# EAGLE board SparkFun_Noisy_Cricket-Panel_V10 (EAGLE 7.7.0), part 1 of 3
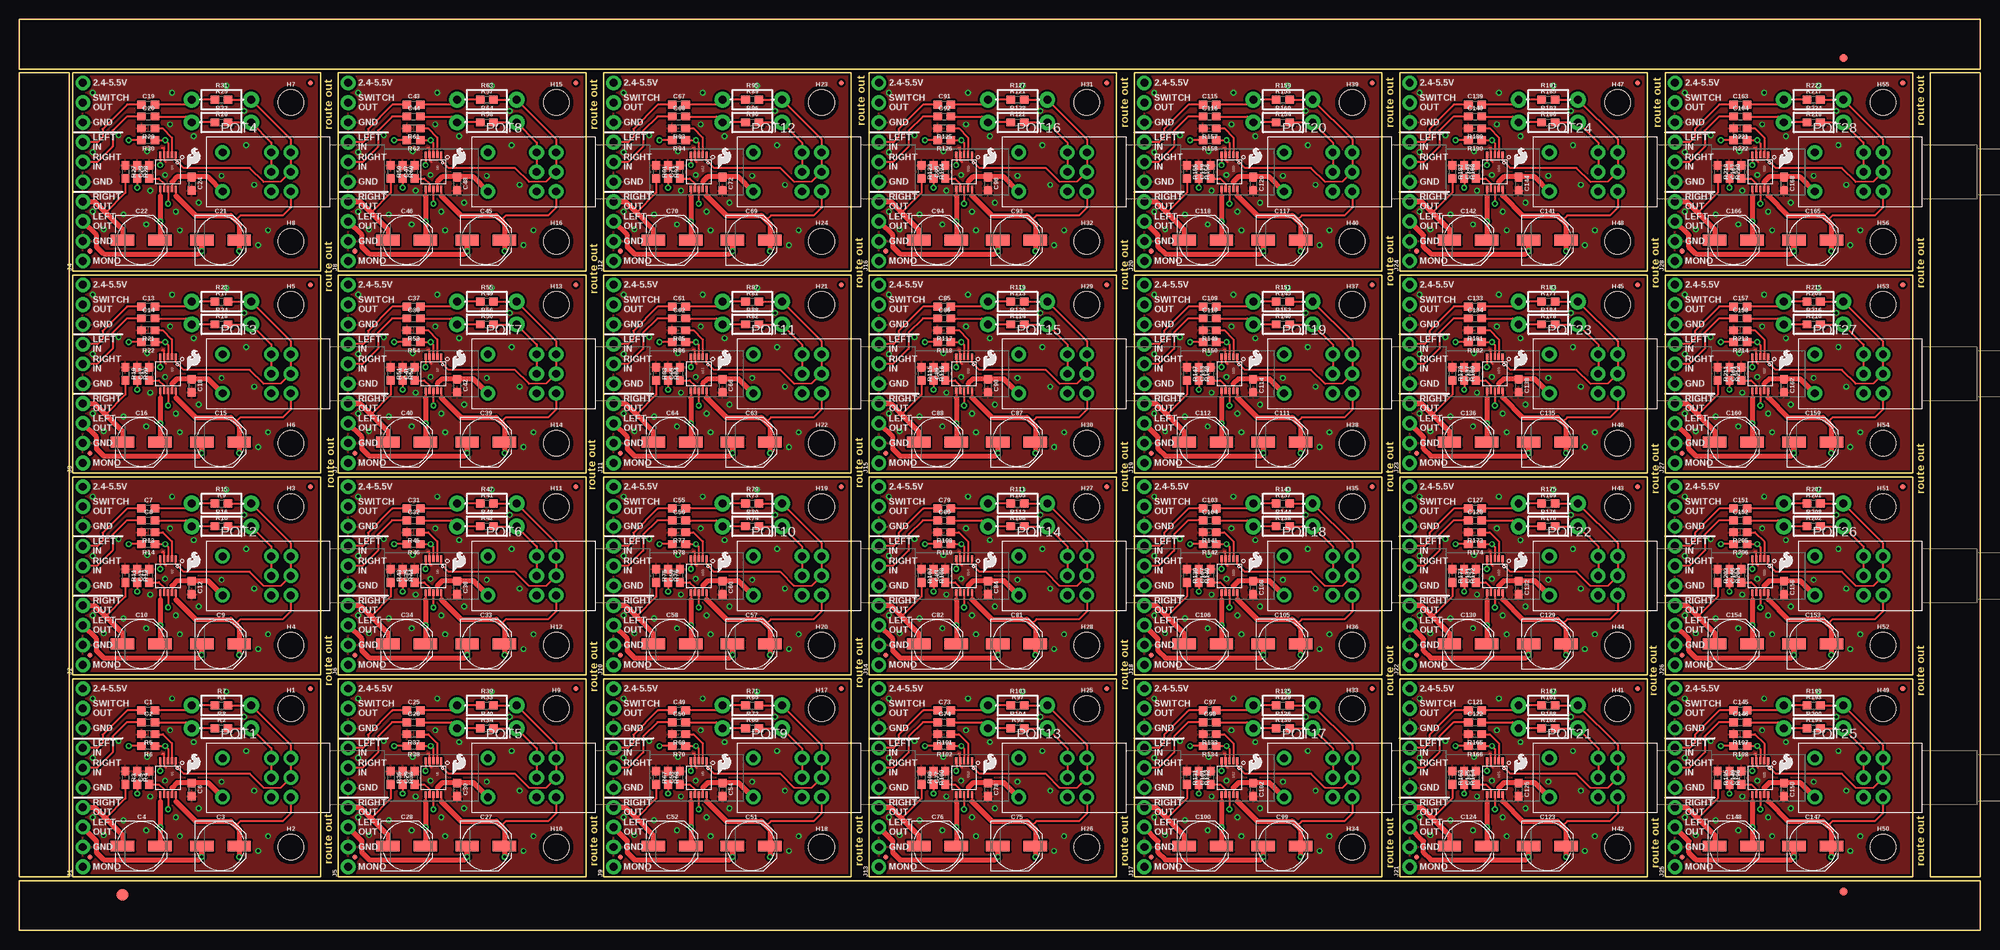
[diagram p0: board, top side]
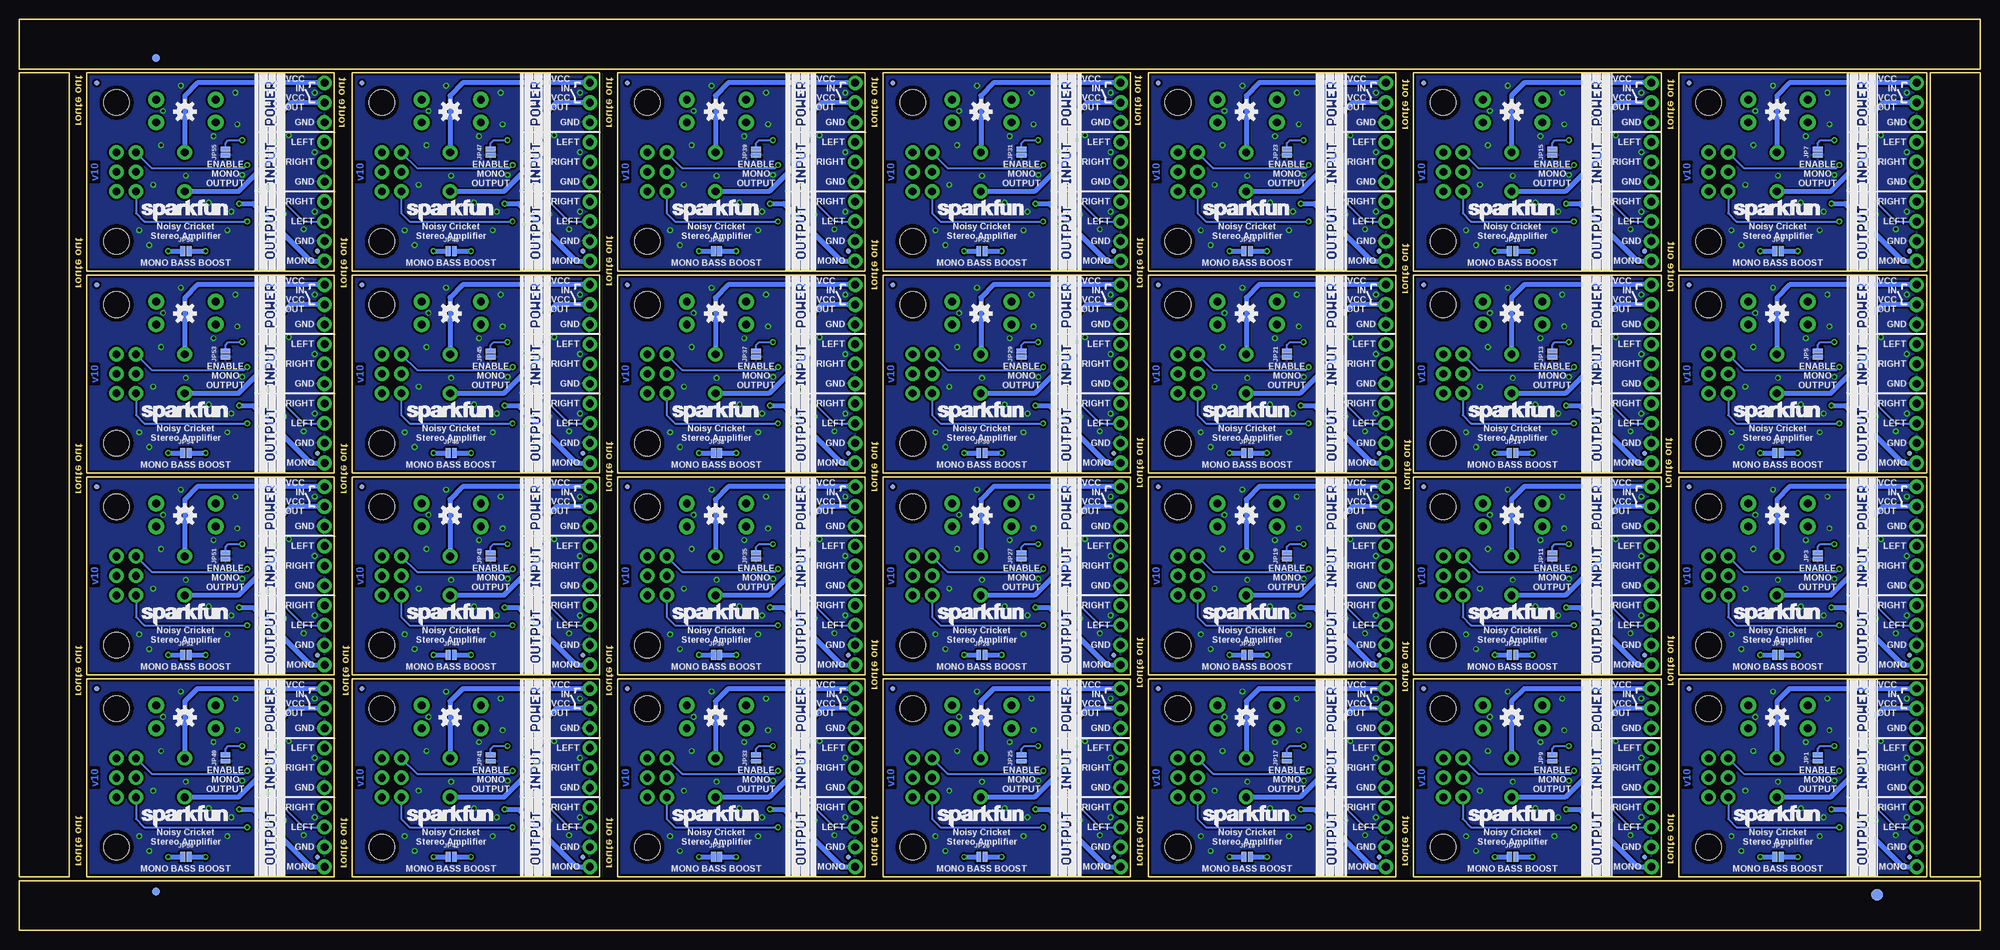
[diagram p1: board, bottom side, seen from below]

Size 251.46 x 116.84 mm. Coordinates in mm from the lower left corner, seen from the top.
Outline: 6.35,79.25 6.35,6.86 0,6.86 0,29.72
Outline: 0,27.18 0,109.98 6.35,109.98 6.35,76.71
Outline: 79.25,0 0,0 0,6.35 29.72,6.35
Outline: 27.18,6.35 251.46,6.35 251.46,0 76.71,0
Outline: 170.43,116.84 251.46,116.84 251.46,110.49 219.96,110.49
Outline: 222.5,110.49 0,110.49 0,116.84 172.97,116.84
Outline: 251.46,79.25 251.46,6.86 245.11,6.86 245.11,29.72
Outline: 245.11,27.18 245.11,109.98 251.46,109.98 251.46,76.71
Outline: 6.86,6.86 38.61,6.86 38.61,32.26 6.86,32.26 6.86,6.86
Outline: 6.86,32.77 38.61,32.77 38.61,58.17 6.86,58.17 6.86,32.77
Outline: 6.86,58.67 38.61,58.67 38.61,84.07 6.86,84.07 6.86,58.67
Outline: 6.86,84.58 38.61,84.58 38.61,109.98 6.86,109.98 6.86,84.58
Outline: 40.89,6.86 72.64,6.86 72.64,32.26 40.89,32.26 40.89,6.86
Outline: 40.89,32.77 72.64,32.77 72.64,58.17 40.89,58.17 40.89,32.77
Outline: 40.89,58.67 72.64,58.67 72.64,84.07 40.89,84.07 40.89,58.67
Outline: 40.89,84.58 72.64,84.58 72.64,109.98 40.89,109.98 40.89,84.58
Outline: 74.93,6.86 106.68,6.86 106.68,32.26 74.93,32.26 74.93,6.86
Outline: 74.93,32.77 106.68,32.77 106.68,58.17 74.93,58.17 74.93,32.77
Outline: 74.93,58.67 106.68,58.67 106.68,84.07 74.93,84.07 74.93,58.67
Outline: 74.93,84.58 106.68,84.58 106.68,109.98 74.93,109.98 74.93,84.58
Outline: 108.97,6.86 140.72,6.86 140.72,32.26 108.97,32.26 108.97,6.86
Outline: 108.97,32.77 140.72,32.77 140.72,58.17 108.97,58.17 108.97,32.77
Outline: 108.97,58.67 140.72,58.67 140.72,84.07 108.97,84.07 108.97,58.67
Outline: 108.97,84.58 140.72,84.58 140.72,109.98 108.97,109.98 108.97,84.58
Outline: 143,6.86 174.75,6.86 174.75,32.26 143,32.26 143,6.86
Outline: 143,32.77 174.75,32.77 174.75,58.17 143,58.17 143,32.77
Outline: 143,58.67 174.75,58.67 174.75,84.07 143,84.07 143,58.67
Outline: 143,84.58 174.75,84.58 174.75,109.98 143,109.98 143,84.58
Outline: 177.04,6.86 208.79,6.86 208.79,32.26 177.04,32.26 177.04,6.86
Outline: 177.04,32.77 208.79,32.77 208.79,58.17 177.04,58.17 177.04,32.77
Outline: 177.04,58.67 208.79,58.67 208.79,84.07 177.04,84.07 177.04,58.67
Outline: 177.04,84.58 208.79,84.58 208.79,109.98 177.04,109.98 177.04,84.58
Outline: 211.07,6.86 242.82,6.86 242.82,32.26 211.07,32.26 211.07,6.86
Outline: 211.07,32.77 242.82,32.77 242.82,58.17 211.07,58.17 211.07,32.77
Outline: 211.07,58.67 242.82,58.67 242.82,84.07 211.07,84.07 211.07,58.67
Outline: 211.07,84.58 242.82,84.58 242.82,109.98 211.07,109.98 211.07,84.58
Copper layers (1*16): Top 0.035mm / dielectric 1.5mm / Bottom 0.035mm
Design rules "SparkFun-2-layer-TIGHT": minimum track width 7mil, minimum drill 15mil, track to track 7mil, track to pad 7mil, pad to pad 7mil, via to via 7mil, smd to smd 7mil, copper to edge 7mil, drill to drill 7mil, minimum pad ring 7mil, minimum via ring 7mil, stop-mask expansion 4mil, vias tented up to drill 25mil, thermal gap 10mil

## Footprints (pad centres in the part's own frame; a part is rotated, then mirrored left to right if it is on the bottom)
0603 = smd 1.1 x 1: 1 -0.85,0; 2 0.85,0
PANASONIC_D = smd 3 x 1.4: + 2.4,0; - -2.4,0
FIDUCIAL-1.5X3 = smd 1.5 x 1.5: 1 0,0
FIDUCIAL-1X2 = smd 1 x 1: 1 0,0
FIDUCIAL-MICRO = smd 0.635 x 0.635: 1 0,0
STAND-OFF = hole 3.302: 0,0
1X10_NO_SILK = drill 1.016 pad 1.88: 1 0,0; 2 2.54,0; 3 5.08,0; 4 7.62,0; 5 10.16,0; 6 12.7,0; 7 15.24,0; 8 17.78,0; 9 20.32,0; 10 22.86,0
SMT-JUMPER_2_NO_NO-SILK = smd 0.635 x 1.27: 1 -0.406,0; 2 0.406,0
POT-DUAL-SWITCH-PTH = drill 1 pad 1.88: A1 2.54,2.5; A2 2.54,0; A3 2.54,-2.5; B1 0.04,2.5; B2 0.04,0; B3 0.04,-2.5; SW1 -6.21,2.5; SW2 -6.21,-2.5
AXIAL-0.3-KIT = drill 1.016 pad 2.032: P$1 -3.81,0; P$2 3.81,0
TFSOP-10 = smd 0.85 x 0.29: BP 2.175,-0.5; BTL 2.175,0; GND -2.175,-0.5; HP-IN -2.175,0; LIN -2.175,1; LOUT 2.175,1; RIN -2.175,-1; ROUT 2.175,-1; SDN -2.175,0.5; VDD 2.175,0.5

## Placement (x,y rotation side)
C1  1.0uF  [0603]  16.51,28.19 0 top
C2  1.0uF  [0603]  16.51,26.67 0 top
C3  100uF  [PANASONIC_D]  25.78,10.79 0 top
C4  100uF  [PANASONIC_D]  15.62,10.79 0 top
C5  1.0uF  [0603]  16.64,19.56 90 top
C6  1.0uF  [0603]  22.1,18.03 270 top
C7  1.0uF  [0603]  16.51,54.1 0 top
C8  1.0uF  [0603]  16.51,52.58 0 top
C9  100uF  [PANASONIC_D]  25.78,36.7 0 top
C10  100uF  [PANASONIC_D]  15.62,36.7 0 top
C11  1.0uF  [0603]  16.64,45.47 90 top
C12  1.0uF  [0603]  22.1,43.94 270 top
C13  1.0uF  [0603]  16.51,80.01 0 top
C14  1.0uF  [0603]  16.51,78.49 0 top
C15  100uF  [PANASONIC_D]  25.78,62.61 0 top
C16  100uF  [PANASONIC_D]  15.62,62.61 0 top
C17  1.0uF  [0603]  16.64,71.37 90 top
C18  1.0uF  [0603]  22.1,69.85 270 top
C19  1.0uF  [0603]  16.51,105.92 0 top
C20  1.0uF  [0603]  16.51,104.39 0 top
C21  100uF  [PANASONIC_D]  25.78,88.52 0 top
C22  100uF  [PANASONIC_D]  15.62,88.52 0 top
C23  1.0uF  [0603]  16.64,97.28 90 top
C24  1.0uF  [0603]  22.1,95.76 270 top
C25  1.0uF  [0603]  50.55,28.19 0 top
C26  1.0uF  [0603]  50.55,26.67 0 top
C27  100uF  [PANASONIC_D]  59.82,10.79 0 top
C28  100uF  [PANASONIC_D]  49.66,10.79 0 top
C29  1.0uF  [0603]  50.67,19.56 90 top
C30  1.0uF  [0603]  56.13,18.03 270 top
C31  1.0uF  [0603]  50.55,54.1 0 top
C32  1.0uF  [0603]  50.55,52.58 0 top
C33  100uF  [PANASONIC_D]  59.82,36.7 0 top
C34  100uF  [PANASONIC_D]  49.66,36.7 0 top
C35  1.0uF  [0603]  50.67,45.47 90 top
C36  1.0uF  [0603]  56.13,43.94 270 top
C37  1.0uF  [0603]  50.55,80.01 0 top
C38  1.0uF  [0603]  50.55,78.49 0 top
C39  100uF  [PANASONIC_D]  59.82,62.61 0 top
C40  100uF  [PANASONIC_D]  49.66,62.61 0 top
C41  1.0uF  [0603]  50.67,71.37 90 top
C42  1.0uF  [0603]  56.13,69.85 270 top
C43  1.0uF  [0603]  50.55,105.92 0 top
C44  1.0uF  [0603]  50.55,104.39 0 top
C45  100uF  [PANASONIC_D]  59.82,88.52 0 top
C46  100uF  [PANASONIC_D]  49.66,88.52 0 top
C47  1.0uF  [0603]  50.67,97.28 90 top
C48  1.0uF  [0603]  56.13,95.76 270 top
C49  1.0uF  [0603]  84.58,28.19 0 top
C50  1.0uF  [0603]  84.58,26.67 0 top
C51  100uF  [PANASONIC_D]  93.85,10.79 0 top
C52  100uF  [PANASONIC_D]  83.69,10.79 0 top
C53  1.0uF  [0603]  84.71,19.56 90 top
C54  1.0uF  [0603]  90.17,18.03 270 top
C55  1.0uF  [0603]  84.58,54.1 0 top
C56  1.0uF  [0603]  84.58,52.58 0 top
C57  100uF  [PANASONIC_D]  93.85,36.7 0 top
C58  100uF  [PANASONIC_D]  83.69,36.7 0 top
C59  1.0uF  [0603]  84.71,45.47 90 top
C60  1.0uF  [0603]  90.17,43.94 270 top
C61  1.0uF  [0603]  84.58,80.01 0 top
C62  1.0uF  [0603]  84.58,78.49 0 top
C63  100uF  [PANASONIC_D]  93.85,62.61 0 top
C64  100uF  [PANASONIC_D]  83.69,62.61 0 top
C65  1.0uF  [0603]  84.71,71.37 90 top
C66  1.0uF  [0603]  90.17,69.85 270 top
C67  1.0uF  [0603]  84.58,105.92 0 top
C68  1.0uF  [0603]  84.58,104.39 0 top
C69  100uF  [PANASONIC_D]  93.85,88.52 0 top
C70  100uF  [PANASONIC_D]  83.69,88.52 0 top
C71  1.0uF  [0603]  84.71,97.28 90 top
C72  1.0uF  [0603]  90.17,95.76 270 top
C73  1.0uF  [0603]  118.62,28.19 0 top
C74  1.0uF  [0603]  118.62,26.67 0 top
C75  100uF  [PANASONIC_D]  127.89,10.79 0 top
C76  100uF  [PANASONIC_D]  117.73,10.79 0 top
C77  1.0uF  [0603]  118.75,19.56 90 top
C78  1.0uF  [0603]  124.21,18.03 270 top
C79  1.0uF  [0603]  118.62,54.1 0 top
C80  1.0uF  [0603]  118.62,52.58 0 top
C81  100uF  [PANASONIC_D]  127.89,36.7 0 top
C82  100uF  [PANASONIC_D]  117.73,36.7 0 top
C83  1.0uF  [0603]  118.75,45.47 90 top
C84  1.0uF  [0603]  124.21,43.94 270 top
C85  1.0uF  [0603]  118.62,80.01 0 top
C86  1.0uF  [0603]  118.62,78.49 0 top
C87  100uF  [PANASONIC_D]  127.89,62.61 0 top
C88  100uF  [PANASONIC_D]  117.73,62.61 0 top
C89  1.0uF  [0603]  118.75,71.37 90 top
C90  1.0uF  [0603]  124.21,69.85 270 top
C91  1.0uF  [0603]  118.62,105.92 0 top
C92  1.0uF  [0603]  118.62,104.39 0 top
C93  100uF  [PANASONIC_D]  127.89,88.52 0 top
C94  100uF  [PANASONIC_D]  117.73,88.52 0 top
C95  1.0uF  [0603]  118.75,97.28 90 top
C96  1.0uF  [0603]  124.21,95.76 270 top
C97  1.0uF  [0603]  152.65,28.19 0 top
C98  1.0uF  [0603]  152.65,26.67 0 top
C99  100uF  [PANASONIC_D]  161.93,10.79 0 top
C100  100uF  [PANASONIC_D]  151.76,10.79 0 top
C101  1.0uF  [0603]  152.78,19.56 90 top
C102  1.0uF  [0603]  158.24,18.03 270 top
C103  1.0uF  [0603]  152.65,54.1 0 top
C104  1.0uF  [0603]  152.65,52.58 0 top
C105  100uF  [PANASONIC_D]  161.93,36.7 0 top
C106  100uF  [PANASONIC_D]  151.76,36.7 0 top
C107  1.0uF  [0603]  152.78,45.47 90 top
C108  1.0uF  [0603]  158.24,43.94 270 top
C109  1.0uF  [0603]  152.65,80.01 0 top
C110  1.0uF  [0603]  152.65,78.49 0 top
C111  100uF  [PANASONIC_D]  161.93,62.61 0 top
C112  100uF  [PANASONIC_D]  151.76,62.61 0 top
C113  1.0uF  [0603]  152.78,71.37 90 top
C114  1.0uF  [0603]  158.24,69.85 270 top
C115  1.0uF  [0603]  152.65,105.92 0 top
C116  1.0uF  [0603]  152.65,104.39 0 top
C117  100uF  [PANASONIC_D]  161.93,88.52 0 top
C118  100uF  [PANASONIC_D]  151.76,88.52 0 top
C119  1.0uF  [0603]  152.78,97.28 90 top
C120  1.0uF  [0603]  158.24,95.76 270 top
C121  1.0uF  [0603]  186.69,28.19 0 top
C122  1.0uF  [0603]  186.69,26.67 0 top
C123  100uF  [PANASONIC_D]  195.96,10.79 0 top
C124  100uF  [PANASONIC_D]  185.8,10.79 0 top
C125  1.0uF  [0603]  186.82,19.56 90 top
C126  1.0uF  [0603]  192.28,18.03 270 top
C127  1.0uF  [0603]  186.69,54.1 0 top
C128  1.0uF  [0603]  186.69,52.58 0 top
C129  100uF  [PANASONIC_D]  195.96,36.7 0 top
C130  100uF  [PANASONIC_D]  185.8,36.7 0 top
C131  1.0uF  [0603]  186.82,45.47 90 top
C132  1.0uF  [0603]  192.28,43.94 270 top
C133  1.0uF  [0603]  186.69,80.01 0 top
C134  1.0uF  [0603]  186.69,78.49 0 top
C135  100uF  [PANASONIC_D]  195.96,62.61 0 top
C136  100uF  [PANASONIC_D]  185.8,62.61 0 top
C137  1.0uF  [0603]  186.82,71.37 90 top
C138  1.0uF  [0603]  192.28,69.85 270 top
C139  1.0uF  [0603]  186.69,105.92 0 top
C140  1.0uF  [0603]  186.69,104.39 0 top
C141  100uF  [PANASONIC_D]  195.96,88.52 0 top
C142  100uF  [PANASONIC_D]  185.8,88.52 0 top
C143  1.0uF  [0603]  186.82,97.28 90 top
C144  1.0uF  [0603]  192.28,95.76 270 top
C145  1.0uF  [0603]  220.73,28.19 0 top
C146  1.0uF  [0603]  220.73,26.67 0 top
C147  100uF  [PANASONIC_D]  230,10.79 0 top
C148  100uF  [PANASONIC_D]  219.84,10.79 0 top
C149  1.0uF  [0603]  220.85,19.56 90 top
C150  1.0uF  [0603]  226.31,18.03 270 top
C151  1.0uF  [0603]  220.73,54.1 0 top
C152  1.0uF  [0603]  220.73,52.58 0 top
C153  100uF  [PANASONIC_D]  230,36.7 0 top
C154  100uF  [PANASONIC_D]  219.84,36.7 0 top
C155  1.0uF  [0603]  220.85,45.47 90 top
C156  1.0uF  [0603]  226.31,43.94 270 top
C157  1.0uF  [0603]  220.73,80.01 0 top
C158  1.0uF  [0603]  220.73,78.49 0 top
C159  100uF  [PANASONIC_D]  230,62.61 0 top
C160  100uF  [PANASONIC_D]  219.84,62.61 0 top
C161  1.0uF  [0603]  220.85,71.37 90 top
C162  1.0uF  [0603]  226.31,69.85 270 top
C163  1.0uF  [0603]  220.73,105.92 0 top
C164  1.0uF  [0603]  220.73,104.39 0 top
C165  100uF  [PANASONIC_D]  230,88.52 0 top
C166  100uF  [PANASONIC_D]  219.84,88.52 0 top
C167  1.0uF  [0603]  220.85,97.28 90 top
C168  1.0uF  [0603]  226.31,95.76 270 top
E$1  [FIDUCIAL-1.5X3]  13.21,4.57 0 top
E$2  [FIDUCIAL-1.5X3]  13.21,4.57 0 bottom
E$3  [FIDUCIAL-1X2]  233.93,4.95 90 bottom
E$4  [FIDUCIAL-1X2]  233.93,111.89 90 bottom
E$5  [FIDUCIAL-1X2]  233.93,111.89 90 top
E$7  [FIDUCIAL-1X2]  233.93,4.95 90 top
FD1  FIDUCIALUFIDUCIAL  [FIDUCIAL-MICRO]  9.02,9.4 0 top
FD2  FIDUCIALUFIDUCIAL  [FIDUCIAL-MICRO]  37.34,30.99 0 top
FD3  FIDUCIALUFIDUCIAL  [FIDUCIAL-MICRO]  9.02,9.4 0 bottom
FD4  FIDUCIALUFIDUCIAL  [FIDUCIAL-MICRO]  37.34,30.99 0 bottom
FD5  FIDUCIALUFIDUCIAL  [FIDUCIAL-MICRO]  9.02,35.31 0 top
FD6  FIDUCIALUFIDUCIAL  [FIDUCIAL-MICRO]  37.34,56.9 0 top
FD7  FIDUCIALUFIDUCIAL  [FIDUCIAL-MICRO]  9.02,35.31 0 bottom
FD8  FIDUCIALUFIDUCIAL  [FIDUCIAL-MICRO]  37.34,56.9 0 bottom
FD9  FIDUCIALUFIDUCIAL  [FIDUCIAL-MICRO]  9.02,61.21 0 top
FD10  FIDUCIALUFIDUCIAL  [FIDUCIAL-MICRO]  37.34,82.8 0 top
FD11  FIDUCIALUFIDUCIAL  [FIDUCIAL-MICRO]  9.02,61.21 0 bottom
FD12  FIDUCIALUFIDUCIAL  [FIDUCIAL-MICRO]  37.34,82.8 0 bottom
FD13  FIDUCIALUFIDUCIAL  [FIDUCIAL-MICRO]  9.02,87.12 0 top
FD14  FIDUCIALUFIDUCIAL  [FIDUCIAL-MICRO]  37.34,108.71 0 top
FD15  FIDUCIALUFIDUCIAL  [FIDUCIAL-MICRO]  9.02,87.12 0 bottom
FD16  FIDUCIALUFIDUCIAL  [FIDUCIAL-MICRO]  37.34,108.71 0 bottom
FD17  FIDUCIALUFIDUCIAL  [FIDUCIAL-MICRO]  43.05,9.4 0 top
FD18  FIDUCIALUFIDUCIAL  [FIDUCIAL-MICRO]  71.37,30.99 0 top
FD19  FIDUCIALUFIDUCIAL  [FIDUCIAL-MICRO]  43.05,9.4 0 bottom
FD20  FIDUCIALUFIDUCIAL  [FIDUCIAL-MICRO]  71.37,30.99 0 bottom
FD21  FIDUCIALUFIDUCIAL  [FIDUCIAL-MICRO]  43.05,35.31 0 top
FD22  FIDUCIALUFIDUCIAL  [FIDUCIAL-MICRO]  71.37,56.9 0 top
FD23  FIDUCIALUFIDUCIAL  [FIDUCIAL-MICRO]  43.05,35.31 0 bottom
FD24  FIDUCIALUFIDUCIAL  [FIDUCIAL-MICRO]  71.37,56.9 0 bottom
FD25  FIDUCIALUFIDUCIAL  [FIDUCIAL-MICRO]  43.05,61.21 0 top
FD26  FIDUCIALUFIDUCIAL  [FIDUCIAL-MICRO]  71.37,82.8 0 top
FD27  FIDUCIALUFIDUCIAL  [FIDUCIAL-MICRO]  43.05,61.21 0 bottom
FD28  FIDUCIALUFIDUCIAL  [FIDUCIAL-MICRO]  71.37,82.8 0 bottom
FD29  FIDUCIALUFIDUCIAL  [FIDUCIAL-MICRO]  43.05,87.12 0 top
FD30  FIDUCIALUFIDUCIAL  [FIDUCIAL-MICRO]  71.37,108.71 0 top
FD31  FIDUCIALUFIDUCIAL  [FIDUCIAL-MICRO]  43.05,87.12 0 bottom
FD32  FIDUCIALUFIDUCIAL  [FIDUCIAL-MICRO]  71.37,108.71 0 bottom
FD33  FIDUCIALUFIDUCIAL  [FIDUCIAL-MICRO]  77.09,9.4 0 top
FD34  FIDUCIALUFIDUCIAL  [FIDUCIAL-MICRO]  105.41,30.99 0 top
FD35  FIDUCIALUFIDUCIAL  [FIDUCIAL-MICRO]  77.09,9.4 0 bottom
FD36  FIDUCIALUFIDUCIAL  [FIDUCIAL-MICRO]  105.41,30.99 0 bottom
FD37  FIDUCIALUFIDUCIAL  [FIDUCIAL-MICRO]  77.09,35.31 0 top
FD38  FIDUCIALUFIDUCIAL  [FIDUCIAL-MICRO]  105.41,56.9 0 top
FD39  FIDUCIALUFIDUCIAL  [FIDUCIAL-MICRO]  77.09,35.31 0 bottom
FD40  FIDUCIALUFIDUCIAL  [FIDUCIAL-MICRO]  105.41,56.9 0 bottom
FD41  FIDUCIALUFIDUCIAL  [FIDUCIAL-MICRO]  77.09,61.21 0 top
FD42  FIDUCIALUFIDUCIAL  [FIDUCIAL-MICRO]  105.41,82.8 0 top
FD43  FIDUCIALUFIDUCIAL  [FIDUCIAL-MICRO]  77.09,61.21 0 bottom
FD44  FIDUCIALUFIDUCIAL  [FIDUCIAL-MICRO]  105.41,82.8 0 bottom
FD45  FIDUCIALUFIDUCIAL  [FIDUCIAL-MICRO]  77.09,87.12 0 top
FD46  FIDUCIALUFIDUCIAL  [FIDUCIAL-MICRO]  105.41,108.71 0 top
FD47  FIDUCIALUFIDUCIAL  [FIDUCIAL-MICRO]  77.09,87.12 0 bottom
FD48  FIDUCIALUFIDUCIAL  [FIDUCIAL-MICRO]  105.41,108.71 0 bottom
FD49  FIDUCIALUFIDUCIAL  [FIDUCIAL-MICRO]  111.12,9.4 0 top
FD50  FIDUCIALUFIDUCIAL  [FIDUCIAL-MICRO]  139.45,30.99 0 top
FD51  FIDUCIALUFIDUCIAL  [FIDUCIAL-MICRO]  111.12,9.4 0 bottom
FD52  FIDUCIALUFIDUCIAL  [FIDUCIAL-MICRO]  139.45,30.99 0 bottom
FD53  FIDUCIALUFIDUCIAL  [FIDUCIAL-MICRO]  111.12,35.31 0 top
FD54  FIDUCIALUFIDUCIAL  [FIDUCIAL-MICRO]  139.45,56.9 0 top
FD55  FIDUCIALUFIDUCIAL  [FIDUCIAL-MICRO]  111.12,35.31 0 bottom
FD56  FIDUCIALUFIDUCIAL  [FIDUCIAL-MICRO]  139.45,56.9 0 bottom
FD57  FIDUCIALUFIDUCIAL  [FIDUCIAL-MICRO]  111.12,61.21 0 top
FD58  FIDUCIALUFIDUCIAL  [FIDUCIAL-MICRO]  139.45,82.8 0 top
FD59  FIDUCIALUFIDUCIAL  [FIDUCIAL-MICRO]  111.12,61.21 0 bottom
FD60  FIDUCIALUFIDUCIAL  [FIDUCIAL-MICRO]  139.45,82.8 0 bottom
FD61  FIDUCIALUFIDUCIAL  [FIDUCIAL-MICRO]  111.12,87.12 0 top
FD62  FIDUCIALUFIDUCIAL  [FIDUCIAL-MICRO]  139.45,108.71 0 top
FD63  FIDUCIALUFIDUCIAL  [FIDUCIAL-MICRO]  111.12,87.12 0 bottom
FD64  FIDUCIALUFIDUCIAL  [FIDUCIAL-MICRO]  139.45,108.71 0 bottom
FD65  FIDUCIALUFIDUCIAL  [FIDUCIAL-MICRO]  145.16,9.4 0 top
FD66  FIDUCIALUFIDUCIAL  [FIDUCIAL-MICRO]  173.48,30.99 0 top
FD67  FIDUCIALUFIDUCIAL  [FIDUCIAL-MICRO]  145.16,9.4 0 bottom
FD68  FIDUCIALUFIDUCIAL  [FIDUCIAL-MICRO]  173.48,30.99 0 bottom
FD69  FIDUCIALUFIDUCIAL  [FIDUCIAL-MICRO]  145.16,35.31 0 top
FD70  FIDUCIALUFIDUCIAL  [FIDUCIAL-MICRO]  173.48,56.9 0 top
FD71  FIDUCIALUFIDUCIAL  [FIDUCIAL-MICRO]  145.16,35.31 0 bottom
FD72  FIDUCIALUFIDUCIAL  [FIDUCIAL-MICRO]  173.48,56.9 0 bottom
FD73  FIDUCIALUFIDUCIAL  [FIDUCIAL-MICRO]  145.16,61.21 0 top
FD74  FIDUCIALUFIDUCIAL  [FIDUCIAL-MICRO]  173.48,82.8 0 top
FD75  FIDUCIALUFIDUCIAL  [FIDUCIAL-MICRO]  145.16,61.21 0 bottom
FD76  FIDUCIALUFIDUCIAL  [FIDUCIAL-MICRO]  173.48,82.8 0 bottom
FD77  FIDUCIALUFIDUCIAL  [FIDUCIAL-MICRO]  145.16,87.12 0 top
FD78  FIDUCIALUFIDUCIAL  [FIDUCIAL-MICRO]  173.48,108.71 0 top
FD79  FIDUCIALUFIDUCIAL  [FIDUCIAL-MICRO]  145.16,87.12 0 bottom
FD80  FIDUCIALUFIDUCIAL  [FIDUCIAL-MICRO]  173.48,108.71 0 bottom
FD81  FIDUCIALUFIDUCIAL  [FIDUCIAL-MICRO]  179.2,9.4 0 top
FD82  FIDUCIALUFIDUCIAL  [FIDUCIAL-MICRO]  207.52,30.99 0 top
FD83  FIDUCIALUFIDUCIAL  [FIDUCIAL-MICRO]  179.2,9.4 0 bottom
FD84  FIDUCIALUFIDUCIAL  [FIDUCIAL-MICRO]  207.52,30.99 0 bottom
FD85  FIDUCIALUFIDUCIAL  [FIDUCIAL-MICRO]  179.2,35.31 0 top
FD86  FIDUCIALUFIDUCIAL  [FIDUCIAL-MICRO]  207.52,56.9 0 top
FD87  FIDUCIALUFIDUCIAL  [FIDUCIAL-MICRO]  179.2,35.31 0 bottom
FD88  FIDUCIALUFIDUCIAL  [FIDUCIAL-MICRO]  207.52,56.9 0 bottom
FD89  FIDUCIALUFIDUCIAL  [FIDUCIAL-MICRO]  179.2,61.21 0 top
FD90  FIDUCIALUFIDUCIAL  [FIDUCIAL-MICRO]  207.52,82.8 0 top
FD91  FIDUCIALUFIDUCIAL  [FIDUCIAL-MICRO]  179.2,61.21 0 bottom
FD92  FIDUCIALUFIDUCIAL  [FIDUCIAL-MICRO]  207.52,82.8 0 bottom
FD93  FIDUCIALUFIDUCIAL  [FIDUCIAL-MICRO]  179.2,87.12 0 top
FD94  FIDUCIALUFIDUCIAL  [FIDUCIAL-MICRO]  207.52,108.71 0 top
FD95  FIDUCIALUFIDUCIAL  [FIDUCIAL-MICRO]  179.2,87.12 0 bottom
FD96  FIDUCIALUFIDUCIAL  [FIDUCIAL-MICRO]  207.52,108.71 0 bottom
FD97  FIDUCIALUFIDUCIAL  [FIDUCIAL-MICRO]  213.23,9.4 0 top
FD98  FIDUCIALUFIDUCIAL  [FIDUCIAL-MICRO]  241.55,30.99 0 top
FD99  FIDUCIALUFIDUCIAL  [FIDUCIAL-MICRO]  213.23,9.4 0 bottom
FD100  FIDUCIALUFIDUCIAL  [FIDUCIAL-MICRO]  241.55,30.99 0 bottom
FD101  FIDUCIALUFIDUCIAL  [FIDUCIAL-MICRO]  213.23,35.31 0 top
FD102  FIDUCIALUFIDUCIAL  [FIDUCIAL-MICRO]  241.55,56.9 0 top
FD103  FIDUCIALUFIDUCIAL  [FIDUCIAL-MICRO]  213.23,35.31 0 bottom
FD104  FIDUCIALUFIDUCIAL  [FIDUCIAL-MICRO]  241.55,56.9 0 bottom
FD105  FIDUCIALUFIDUCIAL  [FIDUCIAL-MICRO]  213.23,61.21 0 top
FD106  FIDUCIALUFIDUCIAL  [FIDUCIAL-MICRO]  241.55,82.8 0 top
FD107  FIDUCIALUFIDUCIAL  [FIDUCIAL-MICRO]  213.23,61.21 0 bottom
FD108  FIDUCIALUFIDUCIAL  [FIDUCIAL-MICRO]  241.55,82.8 0 bottom
FD109  FIDUCIALUFIDUCIAL  [FIDUCIAL-MICRO]  213.23,87.12 0 top
FD110  FIDUCIALUFIDUCIAL  [FIDUCIAL-MICRO]  241.55,108.71 0 top
FD111  FIDUCIALUFIDUCIAL  [FIDUCIAL-MICRO]  213.23,87.12 0 bottom
FD112  FIDUCIALUFIDUCIAL  [FIDUCIAL-MICRO]  241.55,108.71 0 bottom
H1  STAND-OFF  [STAND-OFF]  34.8,28.45 0 top
H2  STAND-OFF  [STAND-OFF]  34.8,10.67 0 top
H3  STAND-OFF  [STAND-OFF]  34.8,54.36 0 top
H4  STAND-OFF  [STAND-OFF]  34.8,36.58 0 top
H5  STAND-OFF  [STAND-OFF]  34.8,80.26 0 top
H6  STAND-OFF  [STAND-OFF]  34.8,62.48 0 top
H7  STAND-OFF  [STAND-OFF]  34.8,106.17 0 top
H8  STAND-OFF  [STAND-OFF]  34.8,88.39 0 top
H9  STAND-OFF  [STAND-OFF]  68.83,28.45 0 top
H10  STAND-OFF  [STAND-OFF]  68.83,10.67 0 top
H11  STAND-OFF  [STAND-OFF]  68.83,54.36 0 top
H12  STAND-OFF  [STAND-OFF]  68.83,36.58 0 top
H13  STAND-OFF  [STAND-OFF]  68.83,80.26 0 top
H14  STAND-OFF  [STAND-OFF]  68.83,62.48 0 top
H15  STAND-OFF  [STAND-OFF]  68.83,106.17 0 top
H16  STAND-OFF  [STAND-OFF]  68.83,88.39 0 top
H17  STAND-OFF  [STAND-OFF]  102.87,28.45 0 top
H18  STAND-OFF  [STAND-OFF]  102.87,10.67 0 top
H19  STAND-OFF  [STAND-OFF]  102.87,54.36 0 top
H20  STAND-OFF  [STAND-OFF]  102.87,36.58 0 top
H21  STAND-OFF  [STAND-OFF]  102.87,80.26 0 top
H22  STAND-OFF  [STAND-OFF]  102.87,62.48 0 top
H23  STAND-OFF  [STAND-OFF]  102.87,106.17 0 top
H24  STAND-OFF  [STAND-OFF]  102.87,88.39 0 top
H25  STAND-OFF  [STAND-OFF]  136.91,28.45 0 top
H26  STAND-OFF  [STAND-OFF]  136.91,10.67 0 top
H27  STAND-OFF  [STAND-OFF]  136.91,54.36 0 top
H28  STAND-OFF  [STAND-OFF]  136.91,36.58 0 top
H29  STAND-OFF  [STAND-OFF]  136.91,80.26 0 top
H30  STAND-OFF  [STAND-OFF]  136.91,62.48 0 top
H31  STAND-OFF  [STAND-OFF]  136.91,106.17 0 top
H32  STAND-OFF  [STAND-OFF]  136.91,88.39 0 top
H33  STAND-OFF  [STAND-OFF]  170.94,28.45 0 top
H34  STAND-OFF  [STAND-OFF]  170.94,10.67 0 top
H35  STAND-OFF  [STAND-OFF]  170.94,54.36 0 top
H36  STAND-OFF  [STAND-OFF]  170.94,36.58 0 top
H37  STAND-OFF  [STAND-OFF]  170.94,80.26 0 top
H38  STAND-OFF  [STAND-OFF]  170.94,62.48 0 top
H39  STAND-OFF  [STAND-OFF]  170.94,106.17 0 top
H40  STAND-OFF  [STAND-OFF]  170.94,88.39 0 top
H41  STAND-OFF  [STAND-OFF]  204.98,28.45 0 top
H42  STAND-OFF  [STAND-OFF]  204.98,10.67 0 top
H43  STAND-OFF  [STAND-OFF]  204.98,54.36 0 top
H44  STAND-OFF  [STAND-OFF]  204.98,36.58 0 top
H45  STAND-OFF  [STAND-OFF]  204.98,80.26 0 top
H46  STAND-OFF  [STAND-OFF]  204.98,62.48 0 top
H47  STAND-OFF  [STAND-OFF]  204.98,106.17 0 top
H48  STAND-OFF  [STAND-OFF]  204.98,88.39 0 top
H49  STAND-OFF  [STAND-OFF]  239.01,28.45 0 top
H50  STAND-OFF  [STAND-OFF]  239.01,10.67 0 top
H51  STAND-OFF  [STAND-OFF]  239.01,54.36 0 top
H52  STAND-OFF  [STAND-OFF]  239.01,36.58 0 top
H53  STAND-OFF  [STAND-OFF]  239.01,80.26 0 top
H54  STAND-OFF  [STAND-OFF]  239.01,62.48 0 top
H55  STAND-OFF  [STAND-OFF]  239.01,106.17 0 top
H56  STAND-OFF  [STAND-OFF]  239.01,88.39 0 top
J1  [1X10_NO_SILK]  8.13,8.13 90 top
J2  [1X10_NO_SILK]  8.13,34.04 90 top
J3  [1X10_NO_SILK]  8.13,59.94 90 top
J4  [1X10_NO_SILK]  8.13,85.85 90 top
J5  [1X10_NO_SILK]  42.16,8.13 90 top
J6  [1X10_NO_SILK]  42.16,34.04 90 top
J7  [1X10_NO_SILK]  42.16,59.94 90 top
J8  [1X10_NO_SILK]  42.16,85.85 90 top
J9  [1X10_NO_SILK]  76.2,8.13 90 top
J10  [1X10_NO_SILK]  76.2,34.04 90 top
J11  [1X10_NO_SILK]  76.2,59.94 90 top
J12  [1X10_NO_SILK]  76.2,85.85 90 top
J13  [1X10_NO_SILK]  110.24,8.13 90 top
J14  [1X10_NO_SILK]  110.24,34.04 90 top
J15  [1X10_NO_SILK]  110.24,59.94 90 top
J16  [1X10_NO_SILK]  110.24,85.85 90 top
J17  [1X10_NO_SILK]  144.27,8.13 90 top
J18  [1X10_NO_SILK]  144.27,34.04 90 top
J19  [1X10_NO_SILK]  144.27,59.94 90 top
J20  [1X10_NO_SILK]  144.27,85.85 90 top
J21  [1X10_NO_SILK]  178.31,8.13 90 top
J22  [1X10_NO_SILK]  178.31,34.04 90 top
J23  [1X10_NO_SILK]  178.31,59.94 90 top
J24  [1X10_NO_SILK]  178.31,85.85 90 top
J25  [1X10_NO_SILK]  212.34,8.13 90 top
J26  [1X10_NO_SILK]  212.34,34.04 90 top
J27  [1X10_NO_SILK]  212.34,59.94 90 top
J28  [1X10_NO_SILK]  212.34,85.85 90 top
JP1  [SMT-JUMPER_2_NO_NO-SILK]  20.83,22.1 90 bottom
JP2  [SMT-JUMPER_2_NO_NO-SILK]  25.91,9.4 0 bottom
JP3  [SMT-JUMPER_2_NO_NO-SILK]  20.83,48.01 90 bottom
JP4  [SMT-JUMPER_2_NO_NO-SILK]  25.91,35.31 0 bottom
JP5  [SMT-JUMPER_2_NO_NO-SILK]  20.83,73.91 90 bottom
JP6  [SMT-JUMPER_2_NO_NO-SILK]  25.91,61.21 0 bottom
JP7  [SMT-JUMPER_2_NO_NO-SILK]  20.83,99.82 90 bottom
JP8  [SMT-JUMPER_2_NO_NO-SILK]  25.91,87.12 0 bottom
JP9  [SMT-JUMPER_2_NO_NO-SILK]  54.86,22.1 90 bottom
JP10  [SMT-JUMPER_2_NO_NO-SILK]  59.94,9.4 0 bottom
JP11  [SMT-JUMPER_2_NO_NO-SILK]  54.86,48.01 90 bottom
JP12  [SMT-JUMPER_2_NO_NO-SILK]  59.94,35.31 0 bottom
JP13  [SMT-JUMPER_2_NO_NO-SILK]  54.86,73.91 90 bottom
JP14  [SMT-JUMPER_2_NO_NO-SILK]  59.94,61.21 0 bottom
JP15  [SMT-JUMPER_2_NO_NO-SILK]  54.86,99.82 90 bottom
JP16  [SMT-JUMPER_2_NO_NO-SILK]  59.94,87.12 0 bottom
JP17  [SMT-JUMPER_2_NO_NO-SILK]  88.9,22.1 90 bottom
JP18  [SMT-JUMPER_2_NO_NO-SILK]  93.98,9.4 0 bottom
JP19  [SMT-JUMPER_2_NO_NO-SILK]  88.9,48.01 90 bottom
JP20  [SMT-JUMPER_2_NO_NO-SILK]  93.98,35.31 0 bottom
JP21  [SMT-JUMPER_2_NO_NO-SILK]  88.9,73.91 90 bottom
JP22  [SMT-JUMPER_2_NO_NO-SILK]  93.98,61.21 0 bottom
JP23  [SMT-JUMPER_2_NO_NO-SILK]  88.9,99.82 90 bottom
JP24  [SMT-JUMPER_2_NO_NO-SILK]  93.98,87.12 0 bottom
JP25  [SMT-JUMPER_2_NO_NO-SILK]  122.94,22.1 90 bottom
JP26  [SMT-JUMPER_2_NO_NO-SILK]  128.02,9.4 0 bottom
JP27  [SMT-JUMPER_2_NO_NO-SILK]  122.94,48.01 90 bottom
JP28  [SMT-JUMPER_2_NO_NO-SILK]  128.02,35.31 0 bottom
JP29  [SMT-JUMPER_2_NO_NO-SILK]  122.94,73.91 90 bottom
JP30  [SMT-JUMPER_2_NO_NO-SILK]  128.02,61.21 0 bottom
JP31  [SMT-JUMPER_2_NO_NO-SILK]  122.94,99.82 90 bottom
JP32  [SMT-JUMPER_2_NO_NO-SILK]  128.02,87.12 0 bottom
JP33  [SMT-JUMPER_2_NO_NO-SILK]  156.97,22.1 90 bottom
JP34  [SMT-JUMPER_2_NO_NO-SILK]  162.05,9.4 0 bottom
JP35  [SMT-JUMPER_2_NO_NO-SILK]  156.97,48.01 90 bottom
JP36  [SMT-JUMPER_2_NO_NO-SILK]  162.05,35.31 0 bottom
JP37  [SMT-JUMPER_2_NO_NO-SILK]  156.97,73.91 90 bottom
JP38  [SMT-JUMPER_2_NO_NO-SILK]  162.05,61.21 0 bottom
JP39  [SMT-JUMPER_2_NO_NO-SILK]  156.97,99.82 90 bottom
JP40  [SMT-JUMPER_2_NO_NO-SILK]  162.05,87.12 0 bottom
JP41  [SMT-JUMPER_2_NO_NO-SILK]  191.01,22.1 90 bottom
JP42  [SMT-JUMPER_2_NO_NO-SILK]  196.09,9.4 0 bottom
JP43  [SMT-JUMPER_2_NO_NO-SILK]  191.01,48.01 90 bottom
JP44  [SMT-JUMPER_2_NO_NO-SILK]  196.09,35.31 0 bottom
JP45  [SMT-JUMPER_2_NO_NO-SILK]  191.01,73.91 90 bottom
JP46  [SMT-JUMPER_2_NO_NO-SILK]  196.09,61.21 0 bottom
JP47  [SMT-JUMPER_2_NO_NO-SILK]  191.01,99.82 90 bottom
JP48  [SMT-JUMPER_2_NO_NO-SILK]  196.09,87.12 0 bottom
JP49  [SMT-JUMPER_2_NO_NO-SILK]  225.04,22.1 90 bottom
JP50  [SMT-JUMPER_2_NO_NO-SILK]  230.12,9.4 0 bottom
JP51  [SMT-JUMPER_2_NO_NO-SILK]  225.04,48.01 90 bottom
JP52  [SMT-JUMPER_2_NO_NO-SILK]  230.12,35.31 0 bottom
JP53  [SMT-JUMPER_2_NO_NO-SILK]  225.04,73.91 90 bottom
JP54  [SMT-JUMPER_2_NO_NO-SILK]  230.12,61.21 0 bottom
JP55  [SMT-JUMPER_2_NO_NO-SILK]  225.04,99.82 90 bottom
JP56  [SMT-JUMPER_2_NO_NO-SILK]  230.12,87.12 0 bottom
LOGO1  SFE_LOGO_NAME.1_INCH  [SFE_LOGO_NAME_.1]  32,12.7 0 bottom
LOGO2  OSHW-LOGOS  [OSHW-LOGO-S]  26.04,27.3 0 bottom
LOGO3  SFE_LOGO_NAME.1_INCH  [SFE_LOGO_NAME_.1]  32,38.61 0 bottom
LOGO4  OSHW-LOGOS  [OSHW-LOGO-S]  26.04,53.21 0 bottom
LOGO5  SFE_LOGO_NAME.1_INCH  [SFE_LOGO_NAME_.1]  32,64.52 0 bottom
LOGO6  OSHW-LOGOS  [OSHW-LOGO-S]  26.04,79.12 0 bottom
LOGO7  SFE_LOGO_NAME.1_INCH  [SFE_LOGO_NAME_.1]  32,90.42 0 bottom
LOGO8  OSHW-LOGOS  [OSHW-LOGO-S]  26.04,105.03 0 bottom
LOGO9  SFE_LOGO_NAME.1_INCH  [SFE_LOGO_NAME_.1]  66.04,12.7 0 bottom
LOGO10  OSHW-LOGOS  [OSHW-LOGO-S]  60.07,27.3 0 bottom
LOGO11  SFE_LOGO_NAME.1_INCH  [SFE_LOGO_NAME_.1]  66.04,38.61 0 bottom
LOGO12  OSHW-LOGOS  [OSHW-LOGO-S]  60.07,53.21 0 bottom
LOGO13  SFE_LOGO_NAME.1_INCH  [SFE_LOGO_NAME_.1]  66.04,64.52 0 bottom
LOGO14  OSHW-LOGOS  [OSHW-LOGO-S]  60.07,79.12 0 bottom
LOGO15  SFE_LOGO_NAME.1_INCH  [SFE_LOGO_NAME_.1]  66.04,90.42 0 bottom
LOGO16  OSHW-LOGOS  [OSHW-LOGO-S]  60.07,105.03 0 bottom
LOGO17  SFE_LOGO_NAME.1_INCH  [SFE_LOGO_NAME_.1]  100.08,12.7 0 bottom
LOGO18  OSHW-LOGOS  [OSHW-LOGO-S]  94.11,27.3 0 bottom
LOGO19  SFE_LOGO_NAME.1_INCH  [SFE_LOGO_NAME_.1]  100.08,38.61 0 bottom
LOGO20  OSHW-LOGOS  [OSHW-LOGO-S]  94.11,53.21 0 bottom
LOGO21  SFE_LOGO_NAME.1_INCH  [SFE_LOGO_NAME_.1]  100.08,64.52 0 bottom
LOGO22  OSHW-LOGOS  [OSHW-LOGO-S]  94.11,79.12 0 bottom
LOGO23  SFE_LOGO_NAME.1_INCH  [SFE_LOGO_NAME_.1]  100.08,90.42 0 bottom
LOGO24  OSHW-LOGOS  [OSHW-LOGO-S]  94.11,105.03 0 bottom
LOGO25  SFE_LOGO_NAME.1_INCH  [SFE_LOGO_NAME_.1]  134.11,12.7 0 bottom
LOGO26  OSHW-LOGOS  [OSHW-LOGO-S]  128.14,27.3 0 bottom
LOGO27  SFE_LOGO_NAME.1_INCH  [SFE_LOGO_NAME_.1]  134.11,38.61 0 bottom
LOGO28  OSHW-LOGOS  [OSHW-LOGO-S]  128.14,53.21 0 bottom
LOGO29  SFE_LOGO_NAME.1_INCH  [SFE_LOGO_NAME_.1]  134.11,64.52 0 bottom
LOGO30  OSHW-LOGOS  [OSHW-LOGO-S]  128.14,79.12 0 bottom
LOGO31  SFE_LOGO_NAME.1_INCH  [SFE_LOGO_NAME_.1]  134.11,90.42 0 bottom
LOGO32  OSHW-LOGOS  [OSHW-LOGO-S]  128.14,105.03 0 bottom
LOGO33  SFE_LOGO_NAME.1_INCH  [SFE_LOGO_NAME_.1]  168.15,12.7 0 bottom
LOGO34  OSHW-LOGOS  [OSHW-LOGO-S]  162.18,27.3 0 bottom
LOGO35  SFE_LOGO_NAME.1_INCH  [SFE_LOGO_NAME_.1]  168.15,38.61 0 bottom
LOGO36  OSHW-LOGOS  [OSHW-LOGO-S]  162.18,53.21 0 bottom
LOGO37  SFE_LOGO_NAME.1_INCH  [SFE_LOGO_NAME_.1]  168.15,64.52 0 bottom
LOGO38  OSHW-LOGOS  [OSHW-LOGO-S]  162.18,79.12 0 bottom
LOGO39  SFE_LOGO_NAME.1_INCH  [SFE_LOGO_NAME_.1]  168.15,90.42 0 bottom
LOGO40  OSHW-LOGOS  [OSHW-LOGO-S]  162.18,105.03 0 bottom
LOGO41  SFE_LOGO_NAME.1_INCH  [SFE_LOGO_NAME_.1]  202.18,12.7 0 bottom
LOGO42  OSHW-LOGOS  [OSHW-LOGO-S]  196.22,27.3 0 bottom
LOGO43  SFE_LOGO_NAME.1_INCH  [SFE_LOGO_NAME_.1]  202.18,38.61 0 bottom
LOGO44  OSHW-LOGOS  [OSHW-LOGO-S]  196.22,53.21 0 bottom
LOGO45  SFE_LOGO_NAME.1_INCH  [SFE_LOGO_NAME_.1]  202.18,64.52 0 bottom
LOGO46  OSHW-LOGOS  [OSHW-LOGO-S]  196.22,79.12 0 bottom
LOGO47  SFE_LOGO_NAME.1_INCH  [SFE_LOGO_NAME_.1]  202.18,90.42 0 bottom
LOGO48  OSHW-LOGOS  [OSHW-LOGO-S]  196.22,105.03 0 bottom
LOGO49  SFE_LOGO_NAME.1_INCH  [SFE_LOGO_NAME_.1]  236.22,12.7 0 bottom
LOGO50  OSHW-LOGOS  [OSHW-LOGO-S]  230.25,27.3 0 bottom
LOGO51  SFE_LOGO_NAME.1_INCH  [SFE_LOGO_NAME_.1]  236.22,38.61 0 bottom
LOGO52  OSHW-LOGOS  [OSHW-LOGO-S]  230.25,53.21 0 bottom
LOGO53  SFE_LOGO_NAME.1_INCH  [SFE_LOGO_NAME_.1]  236.22,64.52 0 bottom
LOGO54  OSHW-LOGOS  [OSHW-LOGO-S]  230.25,79.12 0 bottom
LOGO55  SFE_LOGO_NAME.1_INCH  [SFE_LOGO_NAME_.1]  236.22,90.42 0 bottom
LOGO56  OSHW-LOGOS  [OSHW-LOGO-S]  230.25,105.03 0 bottom
POT1  20k  [POT-DUAL-SWITCH-PTH]  32.26,19.56 0 top
POT2  20k  [POT-DUAL-SWITCH-PTH]  32.26,45.47 0 top
POT3  20k  [POT-DUAL-SWITCH-PTH]  32.26,71.37 0 top
POT4  20k  [POT-DUAL-SWITCH-PTH]  32.26,97.28 0 top
POT5  20k  [POT-DUAL-SWITCH-PTH]  66.29,19.56 0 top
POT6  20k  [POT-DUAL-SWITCH-PTH]  66.29,45.47 0 top
POT7  20k  [POT-DUAL-SWITCH-PTH]  66.29,71.37 0 top
POT8  20k  [POT-DUAL-SWITCH-PTH]  66.29,97.28 0 top
POT9  20k  [POT-DUAL-SWITCH-PTH]  100.33,19.56 0 top
POT10  20k  [POT-DUAL-SWITCH-PTH]  100.33,45.47 0 top
POT11  20k  [POT-DUAL-SWITCH-PTH]  100.33,71.37 0 top
POT12  20k  [POT-DUAL-SWITCH-PTH]  100.33,97.28 0 top
POT13  20k  [POT-DUAL-SWITCH-PTH]  134.37,19.56 0 top
POT14  20k  [POT-DUAL-SWITCH-PTH]  134.37,45.47 0 top
POT15  20k  [POT-DUAL-SWITCH-PTH]  134.37,71.37 0 top
POT16  20k  [POT-DUAL-SWITCH-PTH]  134.37,97.28 0 top
POT17  20k  [POT-DUAL-SWITCH-PTH]  168.4,19.56 0 top
POT18  20k  [POT-DUAL-SWITCH-PTH]  168.4,45.47 0 top
POT19  20k  [POT-DUAL-SWITCH-PTH]  168.4,71.37 0 top
POT20  20k  [POT-DUAL-SWITCH-PTH]  168.4,97.28 0 top
POT21  20k  [POT-DUAL-SWITCH-PTH]  202.44,19.56 0 top
POT22  20k  [POT-DUAL-SWITCH-PTH]  202.44,45.47 0 top
POT23  20k  [POT-DUAL-SWITCH-PTH]  202.44,71.37 0 top
POT24  20k  [POT-DUAL-SWITCH-PTH]  202.44,97.28 0 top
POT25  20k  [POT-DUAL-SWITCH-PTH]  236.47,19.56 0 top
POT26  20k  [POT-DUAL-SWITCH-PTH]  236.47,45.47 0 top
POT27  20k  [POT-DUAL-SWITCH-PTH]  236.47,71.37 0 top
POT28  20k  [POT-DUAL-SWITCH-PTH]  236.47,97.28 0 top
R1  2.2k  [0603]  25.91,28.83 0 top
R2  2.2k  [0603]  25.91,25.91 0 top
R3  1k  [0603]  13.59,19.56 270 top
R4  1k  [0603]  15.11,19.56 270 top
R5  100k  [0603]  16.51,25.15 180 top
R6  100k  [0603]  16.51,23.62 180 top
R7  [AXIAL-0.3-KIT]  25.91,28.83 0 top
R8  [AXIAL-0.3-KIT]  25.91,25.91 0 top
R9  2.2k  [0603]  25.91,54.74 0 top
R10  2.2k  [0603]  25.91,51.82 0 top
R11  1k  [0603]  13.59,45.47 270 top
R12  1k  [0603]  15.11,45.47 270 top
R13  100k  [0603]  16.51,51.05 180 top
R14  100k  [0603]  16.51,49.53 180 top
R15  [AXIAL-0.3-KIT]  25.91,54.74 0 top
R16  [AXIAL-0.3-KIT]  25.91,51.82 0 top
R17  2.2k  [0603]  25.91,80.64 0 top
R18  2.2k  [0603]  25.91,77.72 0 top
R19  1k  [0603]  13.59,71.37 270 top
R20  1k  [0603]  15.11,71.37 270 top
R21  100k  [0603]  16.51,76.96 180 top
R22  100k  [0603]  16.51,75.44 180 top
R23  [AXIAL-0.3-KIT]  25.91,80.64 0 top
R24  [AXIAL-0.3-KIT]  25.91,77.72 0 top
R25  2.2k  [0603]  25.91,106.55 0 top
R26  2.2k  [0603]  25.91,103.63 0 top
R27  1k  [0603]  13.59,97.28 270 top
R28  1k  [0603]  15.11,97.28 270 top
R29  100k  [0603]  16.51,102.87 180 top
R30  100k  [0603]  16.51,101.35 180 top
R31  [AXIAL-0.3-KIT]  25.91,106.55 0 top
R32  [AXIAL-0.3-KIT]  25.91,103.63 0 top
R33  2.2k  [0603]  59.94,28.83 0 top
R34  2.2k  [0603]  59.94,25.91 0 top
R35  1k  [0603]  47.62,19.56 270 top
R36  1k  [0603]  49.15,19.56 270 top
R37  100k  [0603]  50.55,25.15 180 top
R38  100k  [0603]  50.55,23.62 180 top
R39  [AXIAL-0.3-KIT]  59.94,28.83 0 top
R40  [AXIAL-0.3-KIT]  59.94,25.91 0 top
R41  2.2k  [0603]  59.94,54.74 0 top
R42  2.2k  [0603]  59.94,51.82 0 top
R43  1k  [0603]  47.62,45.47 270 top
R44  1k  [0603]  49.15,45.47 270 top
R45  100k  [0603]  50.55,51.05 180 top
R46  100k  [0603]  50.55,49.53 180 top
R47  [AXIAL-0.3-KIT]  59.94,54.74 0 top
R48  [AXIAL-0.3-KIT]  59.94,51.82 0 top
R49  2.2k  [0603]  59.94,80.64 0 top
R50  2.2k  [0603]  59.94,77.72 0 top
R51  1k  [0603]  47.62,71.37 270 top
R52  1k  [0603]  49.15,71.37 270 top
R53  100k  [0603]  50.55,76.96 180 top
R54  100k  [0603]  50.55,75.44 180 top
R55  [AXIAL-0.3-KIT]  59.94,80.64 0 top
R56  [AXIAL-0.3-KIT]  59.94,77.72 0 top
R57  2.2k  [0603]  59.94,106.55 0 top
R58  2.2k  [0603]  59.94,103.63 0 top
R59  1k  [0603]  47.62,97.28 270 top
R60  1k  [0603]  49.15,97.28 270 top
R61  100k  [0603]  50.55,102.87 180 top
R62  100k  [0603]  50.55,101.35 180 top
R63  [AXIAL-0.3-KIT]  59.94,106.55 0 top
R64  [AXIAL-0.3-KIT]  59.94,103.63 0 top
R65  2.2k  [0603]  93.98,28.83 0 top
R66  2.2k  [0603]  93.98,25.91 0 top
R67  1k  [0603]  81.66,19.56 270 top
R68  1k  [0603]  83.19,19.56 270 top
R69  100k  [0603]  84.58,25.15 180 top
R70  100k  [0603]  84.58,23.62 180 top
R71  [AXIAL-0.3-KIT]  93.98,28.83 0 top
R72  [AXIAL-0.3-KIT]  93.98,25.91 0 top
R73  2.2k  [0603]  93.98,54.74 0 top
R74  2.2k  [0603]  93.98,51.82 0 top
R75  1k  [0603]  81.66,45.47 270 top
R76  1k  [0603]  83.19,45.47 270 top
R77  100k  [0603]  84.58,51.05 180 top
R78  100k  [0603]  84.58,49.53 180 top
R79  [AXIAL-0.3-KIT]  93.98,54.74 0 top
R80  [AXIAL-0.3-KIT]  93.98,51.82 0 top
R81  2.2k  [0603]  93.98,80.64 0 top
R82  2.2k  [0603]  93.98,77.72 0 top
R83  1k  [0603]  81.66,71.37 270 top
R84  1k  [0603]  83.19,71.37 270 top
R85  100k  [0603]  84.58,76.96 180 top
R86  100k  [0603]  84.58,75.44 180 top
R87  [AXIAL-0.3-KIT]  93.98,80.64 0 top
R88  [AXIAL-0.3-KIT]  93.98,77.72 0 top
R89  2.2k  [0603]  93.98,106.55 0 top
R90  2.2k  [0603]  93.98,103.63 0 top
R91  1k  [0603]  81.66,97.28 270 top
R92  1k  [0603]  83.19,97.28 270 top
R93  100k  [0603]  84.58,102.87 180 top
R94  100k  [0603]  84.58,101.35 180 top
R95  [AXIAL-0.3-KIT]  93.98,106.55 0 top
R96  [AXIAL-0.3-KIT]  93.98,103.63 0 top
R97  2.2k  [0603]  128.02,28.83 0 top
R98  2.2k  [0603]  128.02,25.91 0 top
R99  1k  [0603]  115.7,19.56 270 top
R100  1k  [0603]  117.22,19.56 270 top
R101  100k  [0603]  118.62,25.15 180 top
R102  100k  [0603]  118.62,23.62 180 top
R103  [AXIAL-0.3-KIT]  128.02,28.83 0 top
R104  [AXIAL-0.3-KIT]  128.02,25.91 0 top
R105  2.2k  [0603]  128.02,54.74 0 top
R106  2.2k  [0603]  128.02,51.82 0 top
R107  1k  [0603]  115.7,45.47 270 top
R108  1k  [0603]  117.22,45.47 270 top
R109  100k  [0603]  118.62,51.05 180 top
R110  100k  [0603]  118.62,49.53 180 top
R111  [AXIAL-0.3-KIT]  128.02,54.74 0 top
R112  [AXIAL-0.3-KIT]  128.02,51.82 0 top
R113  2.2k  [0603]  128.02,80.64 0 top
R114  2.2k  [0603]  128.02,77.72 0 top
R115  1k  [0603]  115.7,71.37 270 top
R116  1k  [0603]  117.22,71.37 270 top
R117  100k  [0603]  118.62,76.96 180 top
R118  100k  [0603]  118.62,75.44 180 top
R119  [AXIAL-0.3-KIT]  128.02,80.64 0 top
R120  [AXIAL-0.3-KIT]  128.02,77.72 0 top
R121  2.2k  [0603]  128.02,106.55 0 top
R122  2.2k  [0603]  128.02,103.63 0 top
R123  1k  [0603]  115.7,97.28 270 top
R124  1k  [0603]  117.22,97.28 270 top
R125  100k  [0603]  118.62,102.87 180 top
R126  100k  [0603]  118.62,101.35 180 top
R127  [AXIAL-0.3-KIT]  128.02,106.55 0 top
R128  [AXIAL-0.3-KIT]  128.02,103.63 0 top
R129  2.2k  [0603]  162.05,28.83 0 top
R130  2.2k  [0603]  162.05,25.91 0 top
R131  1k  [0603]  149.73,19.56 270 top
R132  1k  [0603]  151.26,19.56 270 top
R133  100k  [0603]  152.65,25.15 180 top
R134  100k  [0603]  152.65,23.62 180 top
R135  [AXIAL-0.3-KIT]  162.05,28.83 0 top
R136  [AXIAL-0.3-KIT]  162.05,25.91 0 top
R137  2.2k  [0603]  162.05,54.74 0 top
R138  2.2k  [0603]  162.05,51.82 0 top
R139  1k  [0603]  149.73,45.47 270 top
R140  1k  [0603]  151.26,45.47 270 top
R141  100k  [0603]  152.65,51.05 180 top
R142  100k  [0603]  152.65,49.53 180 top
R143  [AXIAL-0.3-KIT]  162.05,54.74 0 top
R144  [AXIAL-0.3-KIT]  162.05,51.82 0 top
R145  2.2k  [0603]  162.05,80.64 0 top
R146  2.2k  [0603]  162.05,77.72 0 top
R147  1k  [0603]  149.73,71.37 270 top
R148  1k  [0603]  151.26,71.37 270 top
R149  100k  [0603]  152.65,76.96 180 top
R150  100k  [0603]  152.65,75.44 180 top
R151  [AXIAL-0.3-KIT]  162.05,80.64 0 top
R152  [AXIAL-0.3-KIT]  162.05,77.72 0 top
R153  2.2k  [0603]  162.05,106.55 0 top
R154  2.2k  [0603]  162.05,103.63 0 top
R155  1k  [0603]  149.73,97.28 270 top
R156  1k  [0603]  151.26,97.28 270 top
R157  100k  [0603]  152.65,102.87 180 top
R158  100k  [0603]  152.65,101.35 180 top
R159  [AXIAL-0.3-KIT]  162.05,106.55 0 top
R160  [AXIAL-0.3-KIT]  162.05,103.63 0 top
R161  2.2k  [0603]  196.09,28.83 0 top
R162  2.2k  [0603]  196.09,25.91 0 top
R163  1k  [0603]  183.77,19.56 270 top
R164  1k  [0603]  185.29,19.56 270 top
R165  100k  [0603]  186.69,25.15 180 top
R166  100k  [0603]  186.69,23.62 180 top
R167  [AXIAL-0.3-KIT]  196.09,28.83 0 top
R168  [AXIAL-0.3-KIT]  196.09,25.91 0 top
R169  2.2k  [0603]  196.09,54.74 0 top
R170  2.2k  [0603]  196.09,51.82 0 top
R171  1k  [0603]  183.77,45.47 270 top
R172  1k  [0603]  185.29,45.47 270 top
R173  100k  [0603]  186.69,51.05 180 top
R174  100k  [0603]  186.69,49.53 180 top
R175  [AXIAL-0.3-KIT]  196.09,54.74 0 top
R176  [AXIAL-0.3-KIT]  196.09,51.82 0 top
R177  2.2k  [0603]  196.09,80.64 0 top
R178  2.2k  [0603]  196.09,77.72 0 top
R179  1k  [0603]  183.77,71.37 270 top
R180  1k  [0603]  185.29,71.37 270 top
R181  100k  [0603]  186.69,76.96 180 top
R182  100k  [0603]  186.69,75.44 180 top
R183  [AXIAL-0.3-KIT]  196.09,80.64 0 top
R184  [AXIAL-0.3-KIT]  196.09,77.72 0 top
R185  2.2k  [0603]  196.09,106.55 0 top
R186  2.2k  [0603]  196.09,103.63 0 top
R187  1k  [0603]  183.77,97.28 270 top
R188  1k  [0603]  185.29,97.28 270 top
R189  100k  [0603]  186.69,102.87 180 top
R190  100k  [0603]  186.69,101.35 180 top
R191  [AXIAL-0.3-KIT]  196.09,106.55 0 top
R192  [AXIAL-0.3-KIT]  196.09,103.63 0 top
R193  2.2k  [0603]  230.12,28.83 0 top
R194  2.2k  [0603]  230.12,25.91 0 top
R195  1k  [0603]  217.81,19.56 270 top
R196  1k  [0603]  219.33,19.56 270 top
R197  100k  [0603]  220.73,25.15 180 top
R198  100k  [0603]  220.73,23.62 180 top
R199  [AXIAL-0.3-KIT]  230.12,28.83 0 top
R200  [AXIAL-0.3-KIT]  230.12,25.91 0 top
R201  2.2k  [0603]  230.12,54.74 0 top
R202  2.2k  [0603]  230.12,51.82 0 top
R203  1k  [0603]  217.81,45.47 270 top
R204  1k  [0603]  219.33,45.47 270 top
R205  100k  [0603]  220.73,51.05 180 top
R206  100k  [0603]  220.73,49.53 180 top
R207  [AXIAL-0.3-KIT]  230.12,54.74 0 top
R208  [AXIAL-0.3-KIT]  230.12,51.82 0 top
R209  2.2k  [0603]  230.12,80.64 0 top
R210  2.2k  [0603]  230.12,77.72 0 top
R211  1k  [0603]  217.81,71.37 270 top
R212  1k  [0603]  219.33,71.37 270 top
R213  100k  [0603]  220.73,76.96 180 top
R214  100k  [0603]  220.73,75.44 180 top
R215  [AXIAL-0.3-KIT]  230.12,80.64 0 top
R216  [AXIAL-0.3-KIT]  230.12,77.72 0 top
R217  2.2k  [0603]  230.12,106.55 0 top
R218  2.2k  [0603]  230.12,103.63 0 top
R219  1k  [0603]  217.81,97.28 270 top
R220  1k  [0603]  219.33,97.28 270 top
R221  100k  [0603]  220.73,102.87 180 top
R222  100k  [0603]  220.73,101.35 180 top
R223  [AXIAL-0.3-KIT]  230.12,106.55 0 top
R224  [AXIAL-0.3-KIT]  230.12,103.63 0 top
U1  LM4853  [TFSOP-10]  19.05,19.56 270 top
U2  LM4853  [TFSOP-10]  19.05,45.47 270 top
U3  LM4853  [TFSOP-10]  19.05,71.37 270 top
U4  LM4853  [TFSOP-10]  19.05,97.28 270 top
U5  LM4853  [TFSOP-10]  53.09,19.56 270 top
U6  LM4853  [TFSOP-10]  53.09,45.47 270 top
U7  LM4853  [TFSOP-10]  53.09,71.37 270 top
U8  LM4853  [TFSOP-10]  53.09,97.28 270 top
U9  LM4853  [TFSOP-10]  87.12,19.56 270 top
U10  LM4853  [TFSOP-10]  87.12,45.47 270 top
U11  LM4853  [TFSOP-10]  87.12,71.37 270 top
U12  LM4853  [TFSOP-10]  87.12,97.28 270 top
U13  LM4853  [TFSOP-10]  121.16,19.56 270 top
U14  LM4853  [TFSOP-10]  121.16,45.47 270 top
U15  LM4853  [TFSOP-10]  121.16,71.37 270 top
U16  LM4853  [TFSOP-10]  121.16,97.28 270 top
U17  LM4853  [TFSOP-10]  155.19,19.56 270 top
U18  LM4853  [TFSOP-10]  155.19,45.47 270 top
U19  LM4853  [TFSOP-10]  155.19,71.37 270 top
U20  LM4853  [TFSOP-10]  155.19,97.28 270 top
U21  LM4853  [TFSOP-10]  189.23,19.56 270 top
U22  LM4853  [TFSOP-10]  189.23,45.47 270 top
U23  LM4853  [TFSOP-10]  189.23,71.37 270 top
U24  LM4853  [TFSOP-10]  189.23,97.28 270 top
U25  LM4853  [TFSOP-10]  223.27,19.56 270 top
U26  LM4853  [TFSOP-10]  223.27,45.47 270 top
U27  LM4853  [TFSOP-10]  223.27,71.37 270 top
U28  LM4853  [TFSOP-10]  223.27,97.28 270 top
U$1  [SFE_LOGO_FLAME_.1]  21.21,19.68 0 top
U$2  [SFE_LOGO_FLAME_.1]  21.21,45.59 0 top
U$3  [SFE_LOGO_FLAME_.1]  21.21,71.5 0 top
U$4  [SFE_LOGO_FLAME_.1]  21.21,97.41 0 top
U$5  [SFE_LOGO_FLAME_.1]  55.24,19.68 0 top
U$6  [SFE_LOGO_FLAME_.1]  55.24,45.59 0 top
U$7  [SFE_LOGO_FLAME_.1]  55.24,71.5 0 top
U$8  [SFE_LOGO_FLAME_.1]  55.24,97.41 0 top
U$9  [SFE_LOGO_FLAME_.1]  89.28,19.68 0 top
U$10  [SFE_LOGO_FLAME_.1]  89.28,45.59 0 top
U$11  [SFE_LOGO_FLAME_.1]  89.28,71.5 0 top
U$12  [SFE_LOGO_FLAME_.1]  89.28,97.41 0 top
U$13  [SFE_LOGO_FLAME_.1]  123.32,19.68 0 top
U$14  [SFE_LOGO_FLAME_.1]  123.32,45.59 0 top
U$15  [SFE_LOGO_FLAME_.1]  123.32,71.5 0 top
U$16  [SFE_LOGO_FLAME_.1]  123.32,97.41 0 top
U$17  [SFE_LOGO_FLAME_.1]  157.35,19.68 0 top
U$18  [SFE_LOGO_FLAME_.1]  157.35,45.59 0 top
U$19  [SFE_LOGO_FLAME_.1]  157.35,71.5 0 top
U$20  [SFE_LOGO_FLAME_.1]  157.35,97.41 0 top
U$21  [SFE_LOGO_FLAME_.1]  191.39,19.68 0 top
U$22  [SFE_LOGO_FLAME_.1]  191.39,45.59 0 top
U$23  [SFE_LOGO_FLAME_.1]  191.39,71.5 0 top
U$24  [SFE_LOGO_FLAME_.1]  191.39,97.41 0 top
U$25  [SFE_LOGO_FLAME_.1]  225.43,19.68 0 top
U$26  [SFE_LOGO_FLAME_.1]  225.43,45.59 0 top
U$27  [SFE_LOGO_FLAME_.1]  225.43,71.5 0 top
U$28  [SFE_LOGO_FLAME_.1]  225.43,97.41 0 top

## Library data of the parts
C1 C2 C5-C8 C11-C14 C17-C20 C23-C26 C29-C32 C35-C38 C41-C44 C47-C50 C53-C56 C59-C62 C65-C68 C71-C74 C77-C80 C83-C86 C89-C92 C95-C98 C101-C104 C107-C110 C113-C116 C119-C122 C125-C128 C131-C134 C137-C140 C143-C146 C149-C152 C155-C158 C161-C164 C167 C168 = SparkFun-Capacitors; PROD_ID: CAP-13930
C3 C4 C9 C10 C15 C16 C21 C22 C27 C28 C33 C34 C39 C40 C45 C46 C51 C52 C57 C58 C63 C64 C69 C70 C75 C76 C81 C82 C87 C88 C93 C94 C99 C100 C105 C106 C111 C112 C117 C118 C123 C124 C129 C130 C135 C136 C141 C142 C147 C148 C153 C154 C159 C160 C165 C166 = SparkFun-Capacitors; PROD_ID: CAP-12547
E$1 E$2 = SparkFun-Retired
E$3-E$5 E$7 FD1-FD112 LOGO1-LOGO56 U$1-U$28 = SparkFun-Aesthetics
H1-H56 = SparkFun-Hardware
J1-J28 = SparkFun-Connectors; PROD_ID: CONN-11563
JP1-JP56 = SparkFun-Jumpers
POT1-POT28 = SparkFun-Resistors; PROD_ID: RES-13814
R1 R2 R9 R10 R17 R18 R25 R26 R33 R34 R41 R42 R49 R50 R57 R58 R65 R66 R73 R74 R81 R82 R89 R90 R97 R98 R105 R106 R113 R114 R121 R122 R129 R130 R137 R138 R145 R146 R153 R154 R161 R162 R169 R170 R177 R178 R185 R186 R193 R194 R201 R202 R209 R210 R217 R218 = SparkFun-Resistors; PROD_ID: RES-08272
R3 R4 R11 R12 R19 R20 R27 R28 R35 R36 R43 R44 R51 R52 R59 R60 R67 R68 R75 R76 R83 R84 R91 R92 R99 R100 R107 R108 R115 R116 R123 R124 R131 R132 R139 R140 R147 R148 R155 R156 R163 R164 R171 R172 R179 R180 R187 R188 R195 R196 R203 R204 R211 R212 R219 R220 = SparkFun-Resistors; PROD_ID: RES-07856
R5 R6 R13 R14 R21 R22 R29 R30 R37 R38 R45 R46 R53 R54 R61 R62 R69 R70 R77 R78 R85 R86 R93 R94 R101 R102 R109 R110 R117 R118 R125 R126 R133 R134 R141 R142 R149 R150 R157 R158 R165 R166 R173 R174 R181 R182 R189 R190 R197 R198 R205 R206 R213 R214 R221 R222 = SparkFun-Resistors; PROD_ID: RES-07828
R7 R8 R15 R16 R23 R24 R31 R32 R39 R40 R47 R48 R55 R56 R63 R64 R71 R72 R79 R80 R87 R88 R95 R96 R103 R104 R111 R112 R119 R120 R127 R128 R135 R136 R143 R144 R151 R152 R159 R160 R167 R168 R175 R176 R183 R184 R191 R192 R199 R200 R207 R208 R215 R216 R223 R224 = SparkFun-Resistors
U1-U28 = SparkFun-IC-Amplifiers; PROD_ID: IC-13812